# Altium PCB NFC_Necklace.PcbDoc
Units mm, origin at the board's own origin, x right, y up, seen from the top; angles counter-clockwise.
Board outline 27.81 x 47.12 mm, 2 copper layers (Top Layer, Bottom Layer); 5 components, 5 nets, 16 pads, 2 vias.
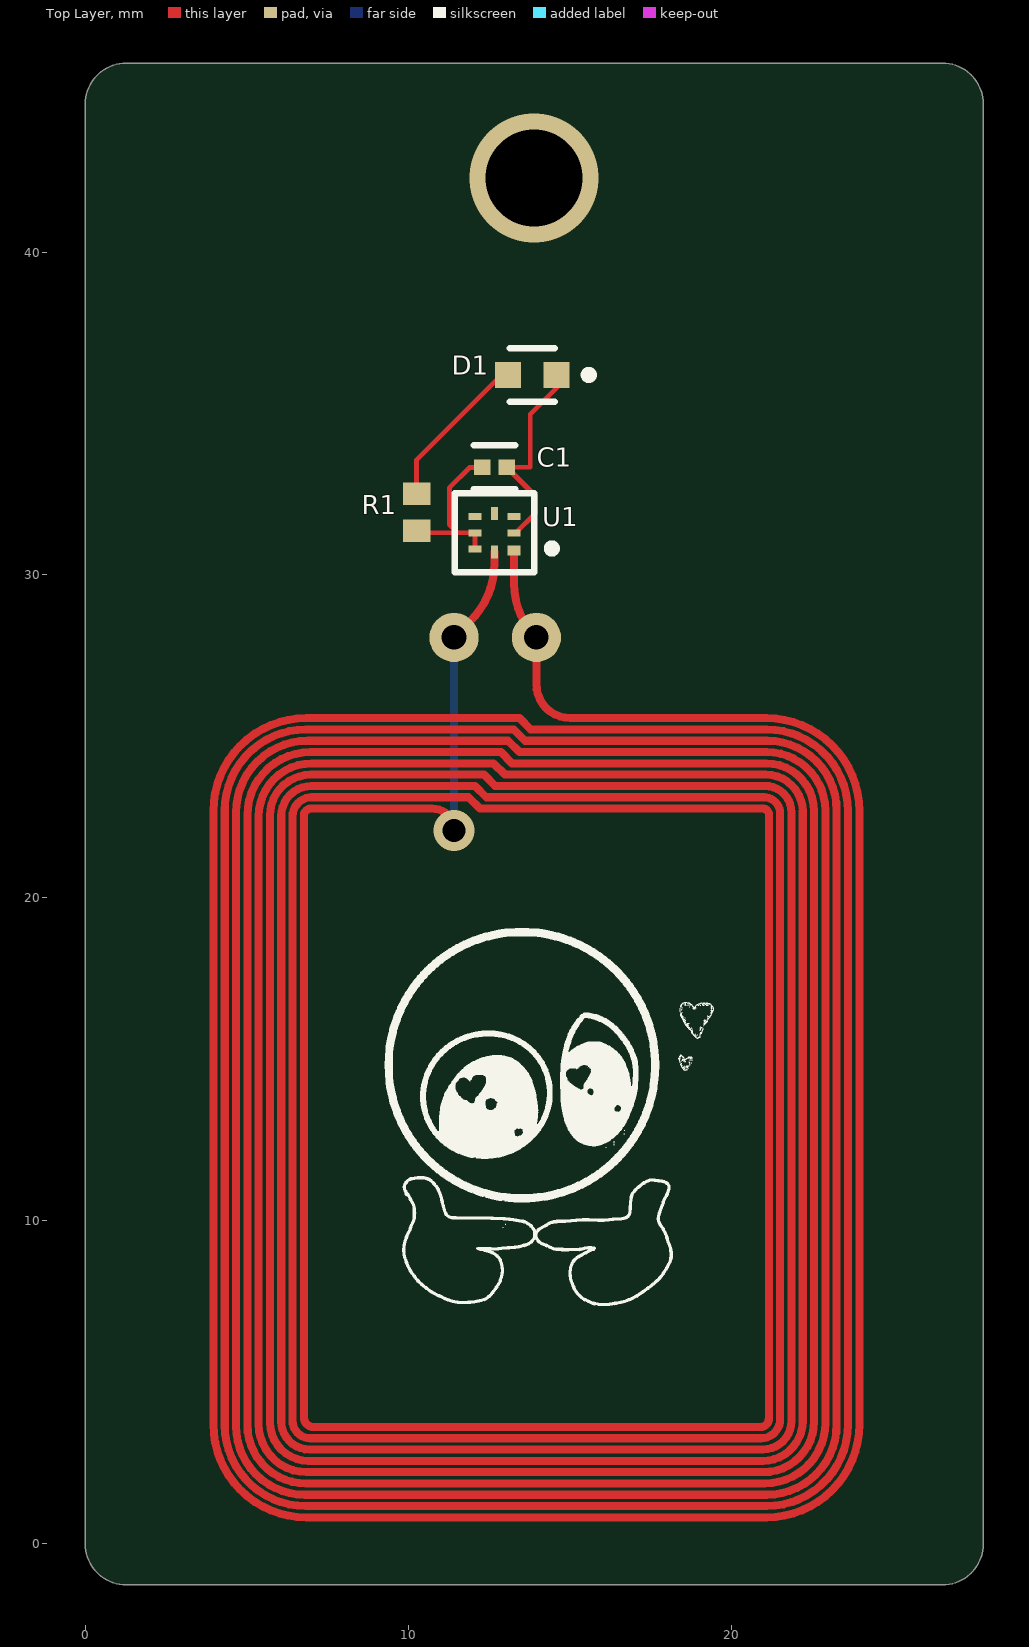
[diagram p0: Top Layer view]
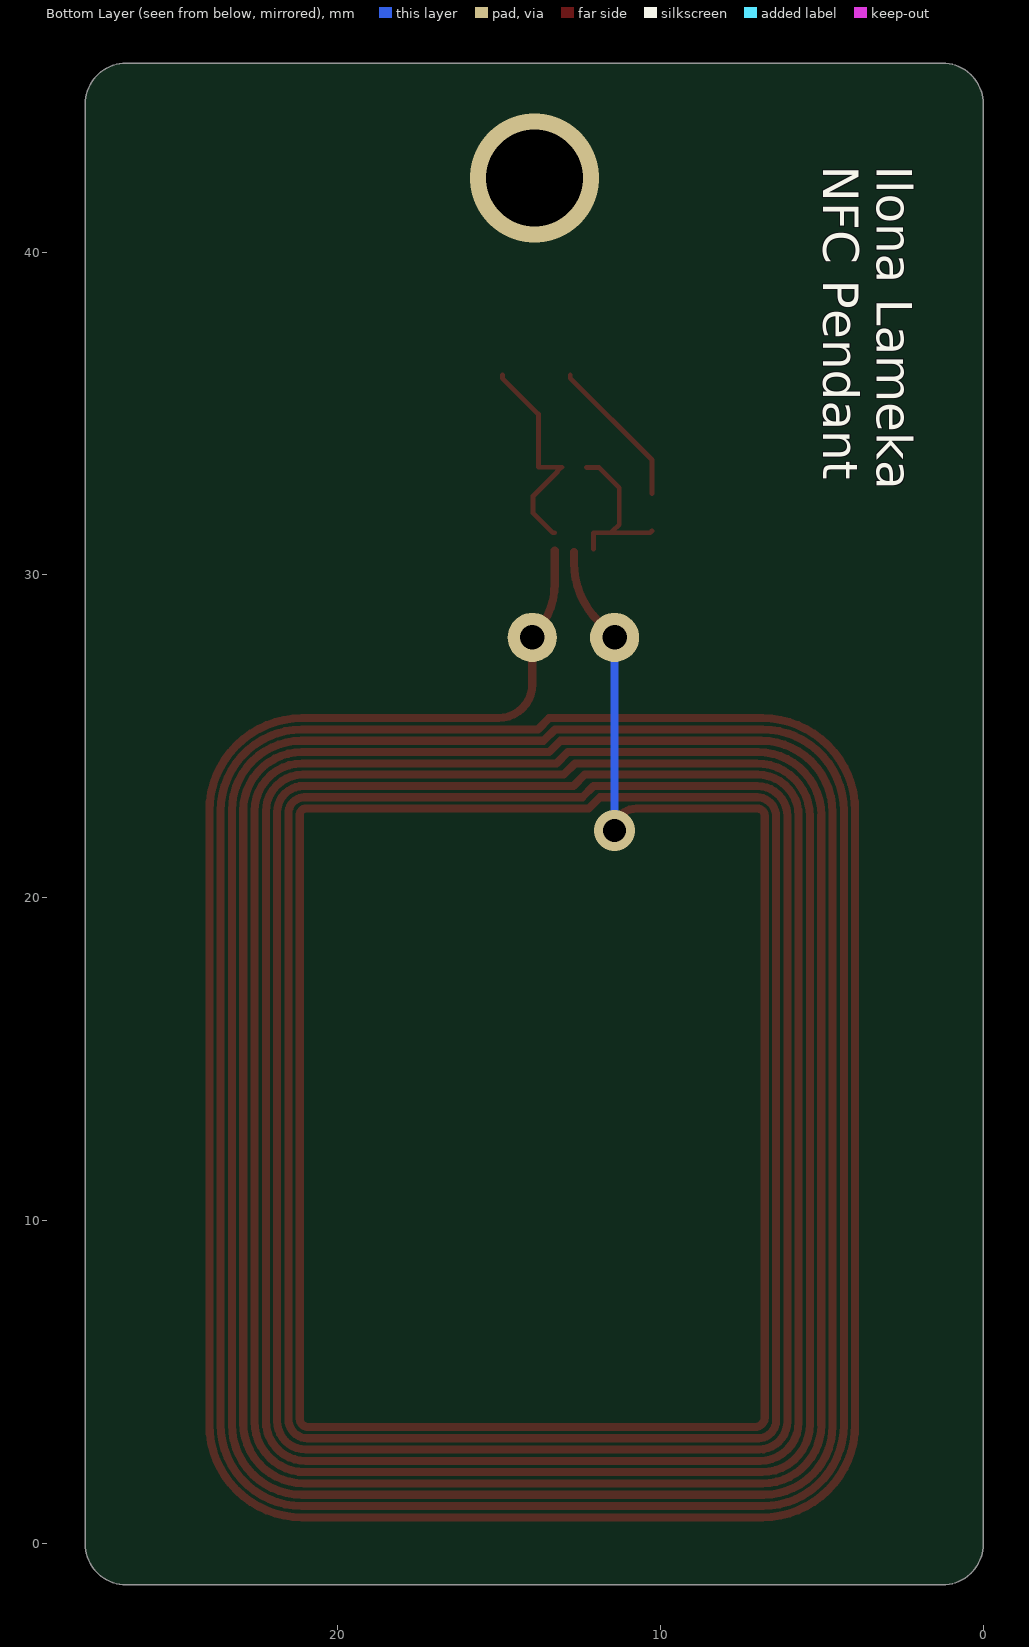
[diagram p1: Bottom Layer view, seen from below]
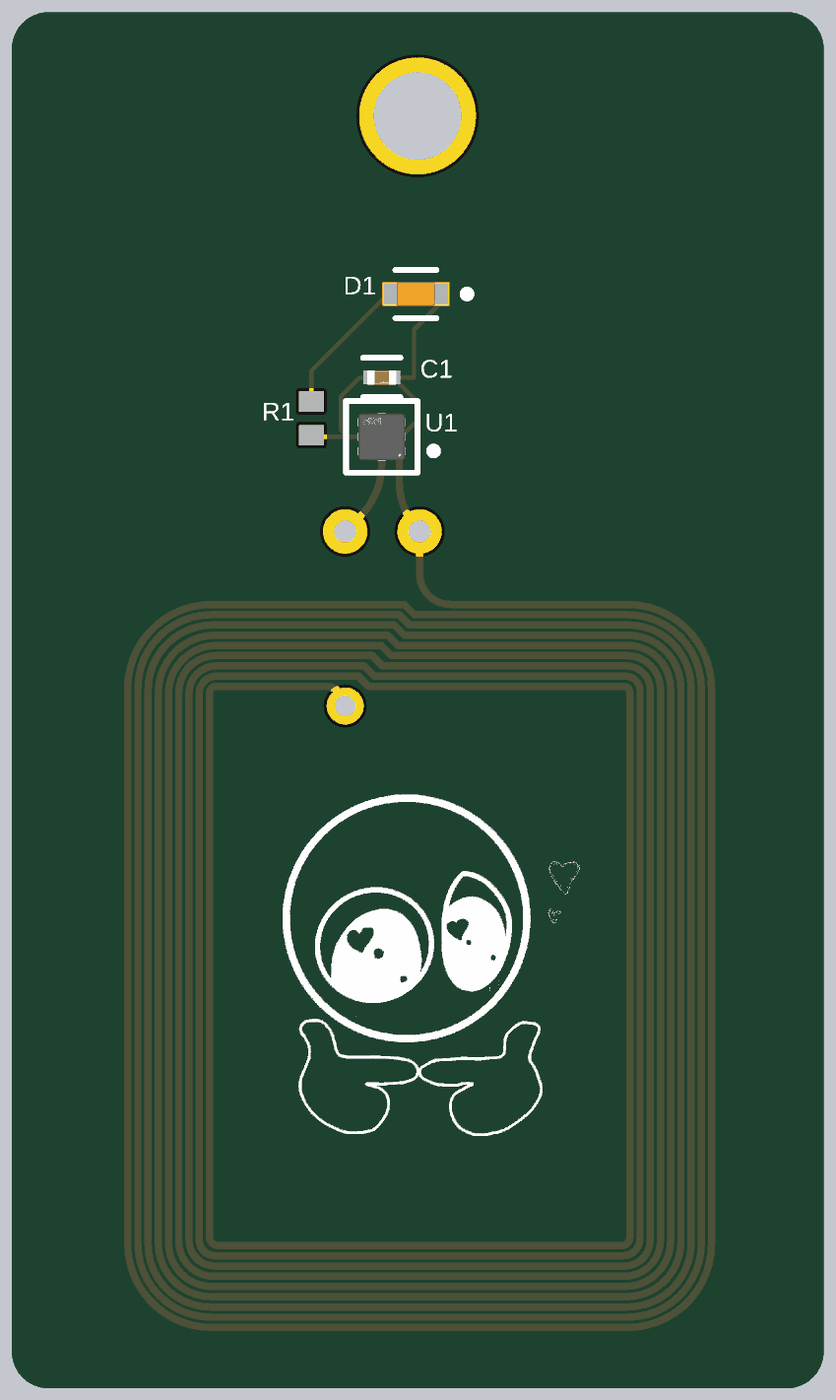
[diagram p2: 3D render of the assembled board from above, using the file's embedded part models]

## Layer stack, top to bottom
Top Solder: solder mask 0.0102, Solder Resist, Dk 3.5
Top Layer: signal copper 0.0356
Dielectric 1: dielectric 0.32, FR-4, Dk 4.8
Bottom Layer: signal copper 0.0356
Bottom Solder: solder mask 0.0102, Solder Resist, Dk 3.5

## Board outline
0,0 ccw(c1.27,0) 1.27,-1.27 26.543,-1.27 ccw(c26.543,0) 27.813,0 27.813,44.577 ccw(c26.543,44.577) 26.543,45.847 1.27,45.847 ccw(c1.27,44.577) 0,44.577

## Design rules (kind name [scope] priority, off if disabled: settings)
Clearance [All] p1: gap=0.254 ignorepadtopadclearanceinfootprint=FALSE except(0: Arc-Arc Arc-Track Arc-SMDPad Arc-Fill Arc-Poly Arc-Region Track-Track Track-SMDPad Track-Fill Track-Poly Track-Region SMDPad-SMDPad SMDPad-Fill SMDPad-Poly SMDPad-Region)
NetAntennae [All] p1: netantennaetolerance=5
PolygonConnect [All] p1: connectstyle=Relief reliefconductorwidth=0.254 reliefentries=4 polygonreliefangle="90 Angle" airgapwidth=0.254
RoutingVias [All] p1: holewidth=0.711 width=1.27 viastyle="Through Hole" minholewidth=0.711 minwidth=1.27 maxholewidth=0.711 maxwidth=1.27
SolderMaskExpansion [All] p1: expansion=0.102 istentingtop=FALSE
Width [All] p1: maxlimit=0.3 minlimit=0.1 preferedwidth=0.25 minimp=50.000000 maximp=50.000000 favimp=50.000000
29 further rules are at their usual default settings.

## Classes and differential pairs
component class FNC_Necklace: C1 D1 R1 U1

## Components (designator, comment, footprint, x,y, rotation, side; value= is the part's Value field where it differs from the comment)
Antenna "NFC_antenna" NFC_antenna-Footprint-1 13.97,28.067 r90 top
C1 "GRM155R71C224KA12D" FP-GRM155-0_05-IPC_C 12.674,33.337 r0 top
D1 "LO L29K-J2L1-24-Z" FP-LO_L29K-MFG 13.843,36.195 r180 top
R1 "CRCW060368R0FKEA" RESC1609X50X30LL10T20 10.261,31.941 r270 top
U1 "NT3H2111W0FHKH" FP-SOT902-3-MFG 12.674,31.305 r180 top

## Footprints (in the part's own frame and the unit in brackets; to place one, negate y for a bottom-side part, rotate by r counter-clockwise, add the part's x,y. Pads: shape width x height; smd on the part's side, far side on the other; paste and mask are expansions set on the pad)
FP-GRM155-0_05-IPC_C [mm]
  rect 0.515x0.472 smd paste+0 mask+0: 1(-0.379,0) 2(0.379,0)
  silkscreen extent -0.64,-0.67 0.64,0.67, body extent -0.74,-0.38 0.74,0.38, height 0.25
FP-LO_L29K-MFG [mm]
  rect 0.8x0.8 smd paste-1000 mask+0: 1(-0.75,0) 2(0.75,0)
  silkscreen extent -1.88,-0.82 0.7,0.82, body extent -1.25,-0.55 1.25,0.55, height 0.25
FP-SOT902-3-MFG [mm]
  rect 0.4x0.32 smd paste-1000 mask-1000: 1(-0.6,0.55)
  rect 0.4x0.22 smd paste-1000 mask-1000: 2(-0.6,0) 3(-0.6,-0.5) 5(0.6,-0.5) 6(0.6,0) 7(0.6,0.5)
  rect 0.22x0.4 smd paste-1000 mask-1000: 4(0,-0.6) 8(0,0.6)
  silkscreen extent -1.9,-1.22 1.22,1.22, body extent -0.95,-0.95 0.95,0.95, height 0.25
NFC_antenna-Footprint-1 [mil]
  round 60 hole 30: 1(0,0) 2(0,100.39)
  Top Layer lines w9.84: -208.66,128.94 -208.66,202.76 -208.66,274.51 ccw(c-217.62,274.51) -217.62,283.46 -295.28,283.46 -891.73,283.46 -950.85,283.46 ccw(c-950.85,271.72) -962.6,271.72 -962.6,213.58 -962.6,-201.77 -962.6,-273.38 ccw(c-952.52,-273.38) -952.52,-283.46 -880.91,-283.46 -283.46,-283.46 -216.1,-283.46 ccw(c-216.1,-276.03) -208.66,-276.03 -208.66,-199.8 -208.66,54.13 -208.66,68.9 -194.88,82.68 -194.88,85.63 -194.88,141.73 -194.88,235.24 -194.88,273.82 ccw(c-218.3,273.82) -218.3,297.24 -264.76,297.24 -889.76,297.24 -954.78,297.24 ccw(c-954.78,275.65) -976.38,275.65 -976.38,208.66 -976.38,-202.76 -976.38,-274.13 ccw(c-953.26,-274.13) -953.26,-297.24 -883.86,-297.24 -299.21,-297.24 -214.57,-297.24 ccw(c-214.57,-277.56) -194.88,-277.56 -194.88,-182.09 -194.88,45.28 -194.88,61.02 -181.1,74.8 -181.1,134.84 -181.1,216.54 -181.1,274.12 ccw(c-218,274.12) -218,311.02 -289.37,311.02 -900.59,311.02 -955.71,311.02 ccw(c-955.71,276.57) -990.16,276.57 -990.16,222.44 -990.16,-182.09 -990.16,-276.16 ccw(c-955.29,-276.16) -955.29,-311.02 -861.22,-311.02 -263.78,-311.02 -213.26,-311.02 ccw(c-213.26,-278.86) -181.1,-278.86 -181.1,-219.49 -181.1,29.53 -181.1,50.2 -167.32,63.98 -167.32,120.08 -167.32,243.11 -167.32,274.8 ccw(c-217.32,274.8) -217.32,324.8 -259.84,324.8 -892.72,324.8 -956.89,324.8 ccw(c-956.89,277.76) -1003.94,277.76 -1003.94,213.58 -1003.94,-214.57 -1003.94,-276.14 ccw(c-955.27,-276.14) -955.27,-324.8 -896.65,-324.8 -230.32,-324.8 -212.49,-324.8 ccw(c-212.49,-279.64) -167.32,-279.64 -167.32,-241.14 -167.32,16.73 -167.32,38.39 -153.54,52.17 -153.54,75.79 -153.54,241.14 -153.54,273.7 ccw(c-218.43,273.7) -218.43,338.58 -272.64,338.58 -892.72,338.58 -959.16,338.58 ccw(c-959.16,280.02) -1017.72,280.02 -1017.72,203.74 -1017.72,-218.5 -1017.72,-276.88 ccw(c-956.01,-276.88) -956.01,-338.58 -902.56,-338.58 -261.81,-338.58 -211.86,-338.58 ccw(c-211.86,-280.27) -153.54,-280.27 -153.54,-222.44 -153.54,14.76 -153.54,29.53 -139.76,43.31 -139.76,59.06 -139.76,259.84 -139.76,275.22 ccw(c-216.91,275.22) -216.91,352.36 -244.09,352.36 -902.56,352.36 -959.91,352.36 ccw(c-959.91,280.78) -1031.5,280.78 -1031.5,244.09 -1031.5,-269.69 -1031.5,-278.46 ccw(c-957.6,-278.46) -957.6,-352.36 -846.46,-352.36 -211.35,-352.36 ccw(c-211.35,-280.78) -139.76,-280.78 -139.76,3.94 -139.76,20.67 -125.98,34.45 -125.98,77.76 -125.98,149.61 -125.98,278.7 ccw(c-213.43,278.7) -213.43,366.14 -961.29,366.14 ccw(c-961.29,282.16) -1045.28,282.16 -1045.28,-280.53 ccw(c-959.66,-280.53) -959.66,-366.14 -210.84,-366.14 ccw(c-210.84,-281.29) -125.98,-281.29 -125.98,-56.1 -125.98,9.84 -125.98,13.78 -112.2,27.56 -112.2,56.1 -112.2,280.84 ccw(c-211.28,280.84) -211.28,379.92 -960.21,379.92 ccw(c-960.21,281.08) -1059.06,281.08 -1059.06,-280.62 ccw(c-959.75,-280.62) -959.75,-379.92 -211.51,-379.92 ccw(c-211.51,-280.62) -112.2,-280.62 -112.2,6.89 -98.43,20.67 -98.43,27.56 -98.43,42.32 -98.43,221.24 -98.43,280.51 ccw(c-211.61,280.51) -211.61,393.7 -216.54,393.7 -869.09,393.7 -959.65,393.7 ccw(c-959.65,280.51) -1072.83,280.51 -1072.83,190.94 -1072.83,-255.91 -1072.83,-280.51 ccw(c-959.65,-280.51) -959.65,-393.7 -946.85,-393.7 -236.22,-393.7 -211.63,-393.7 ccw(c-211.63,-280.49) -98.43,-280.49 -98.43,-41.34 cw(c-57.09,-41.34) -57.09,0 0,0 ; -208.66,126.97 cw(c-235.24,126.97) -235.24,100.39
  Bottom Layer lines w9.84: -235.24,100.39 0,100.39
RESC1609X50X30LL10T20 [mm] "Chip Resistor, 2-Leads, Body 1.55x0.85mm, IPC High Density"
  rect 0.7x0.85 smd: 1(-0.575,0) 2(0.575,0)
  body extent -0.82,-0.48 0.82,0.48, height 0.5

## Part data
Antenna: library part CMP-006-00025-1
C1: library part CMP-1034-02089-3, "Chip Multilayer Ceramic Capacitors for General Purpose, 0402, 0.22uF, X7R, 15%, 10%, 16V", Capacitance=220nF, Case Code (Imperial)=0402, Case Code (Metric)=1005, Dielectric=X7R, Max Operating Temperature=125°C, Min Operating Temperature=-55°C, Package Quantity=1, Tolerance=10%, Voltage=16V, Case/Package=0402, Depth=0.5mm, Height=0.5mm, Lead Free="Lead Free", Length=1mm, Material=Ceramic, Mount="Surface Mount", Packaging="Tape and Reel", Radiation Hardening=No, REACH SVHC="No SVHC", Termination=SMD/SMT, Thickness=0.022inch, Voltage Rating=16V, Voltage Rating (DC)=16V, Width=0.02inch
D1: library part CMP-62016-000043-1, "LED ORANGE DIFFUSED 0603 SMD", Case Code (Imperial)=0603, Case Code (Metric)=1608, Color=Orange, Forward Current=20mA, Forward Voltage=1.8V, Lens Color=White, Max Operating Temperature=100°C, Min Operating Temperature=-40°C, Package Quantity=5000, Test Current=2mA, Case/Package=0603, Dominant Wavelength=606nm, Height=0.65mm, Illumination Color=Orange, Lead Free="Lead Free", Length=1.7mm, Lens Size=0.8mm, Lens Style=Flat, Lens Transparency=Diffused, Luminous Flux=0.04lm, Luminous Intensity=9.8mcd, Mount="Surface Mount", Number of LEDs=1, Number of Pins=2, Packaging="Tape and Reel", Viewing Angle=160°, Wavelength=610nm, Width=0.8mm
R1: library part CMP-2000-03536-1, Manufacturer="Vishay Dale", Resistance=68Ω, Part Number=CRCW060368R0FKEA
U1: library part CMP-10079-000001-1, "IC RFID TRANSP 13.56MHZ 8XQFN", Ambient Temperature Range High=+105°C, Ambient Temperature Range Low=-40°C, Manufacturer=NXP, Package=SOT902-3, Temperature="-40°C to +105°C", Automotive=No, Category=IC, ComponentLink2Description=Datasheet, ComponentLink2URL=https://www.nxp.com/docs/en/data-sheet/NT3H2111_2211.pdf, Device Class L1="Integrated Circuits (ICs)", Device Class L2=unset, Device Class L3=unset, Digikey Description="IC RFID TRANSP 13.56MHZ 8XQFN", Footprint Url=https://www.nxp.com/docs/en/package-information/SOT902-3.pdf, Height=0.5mm, Lead Free=Yes, Manufacturer Part Number=NT3H2111W0FHKH, Max Junction Temp=+105°C, Mouser Description="NFC/RFID Tag and Transponder IC 13560kHz 1KByte 8-Pin XQFN EP T/R", Octopart=https://octopart.com/nt3h2111w0fhkh-nxp+semiconductors-71112033, RoHS=TRUE, Standoff Height=0mm, Temperature Range High=+105°C, Temperature Range Low=-40°C

## Via types
v1: diameter 1.27, hole 0.711, Top Layer to Bottom Layer, 1 vias
v2: diameter 4, hole 3, Top Layer to Bottom Layer, 1 vias

## Nets (pads, with @x,y where several pads share a name; then routed paths per layer and width w, separated by ;. In a path a pad name is that pad's centre, name@x,y a point inside that pad or via, vN(x,y) a via of type N, cw(c..) or ccw(c..) an arc to the next point about the centre after c; other vN are vias at no path point)
NetAntenna_1: Antenna.1 U1.1 | length 2.9
  Top Layer w0.25: U1.1 13.274,29.747 ccw(c15.65,29.747) Antenna.1
  other v1: 11.42,22.092
NetAntenna_2: Antenna.2 U1.8 | length 3
  Top Layer w0.25: Antenna.2 11.93,28.577 ccw(c10.134,30.373) 12.674,30.373 U1.8
NetC1_1: C1.1 R1.2 U1.6 U1.7 | length 5.1
  Top Layer w0.15: R1.2 10.321,31.305 11.531,31.305 ; U1.7 U1.6 11.531,31.305 ; C1.1 12.284,33.326 11.901,33.326 11.277,32.703 11.277,31.559 11.471,31.365 11.531,31.305
NetC1_2: C1.2 D1.1 U1.2 | length 6.8
  Top Layer w0.15: C1.2 C1.2@13.074,33.337 ; U1.2 13.334,31.305 13.944,31.916 13.944,32.446 13.185,33.205 13.185,33.226 C1.2@13.074,33.337 ; D1.1@14.893,36.195 14.893,36.095 13.779,34.981 13.779,33.337 C1.2@13.074,33.337
NetD1_2: D1.2 R1.1 | length 4.7
  Top Layer w0.15: R1.1 10.261,33.563 12.793,36.095 D1.2@12.793,36.195
pads on no net: U1.3 U1.4 U1.5
copper on no net:
  other v2: 13.9,42.291

## Silkscreen, mask and mechanical layers (free items; w line width, h text height)
Top Overlay:
  drawing of 253 lines, arcs and shapes, not listed
Bottom Overlay:
  text "Ilona Lameka  / NFC Pendant" at 4.953,42.672 h1.1 r90
Mechanical 1:
  lines w0.254: 0,0 ccw(c1.27,0) 1.27,-1.27 26.543,-1.27 ccw(c26.543,0) 27.813,0 27.813,44.577 ccw(c26.543,44.577) 26.543,45.847 2.159,45.847 1.27,45.847 ccw(c1.27,44.577) 0,44.577 0,0